# Altium PCB helix_4_single_shield_host.PcbDoc (part 2 of 2)
Units mm, origin at the board's own origin, x right, y up, seen from the top; angles counter-clockwise.
Board outline 54.61 x 130.81 mm, 2 copper layers (Top Layer, Bottom Layer); 77 components, 135 nets, 533 pads, 664 vias.
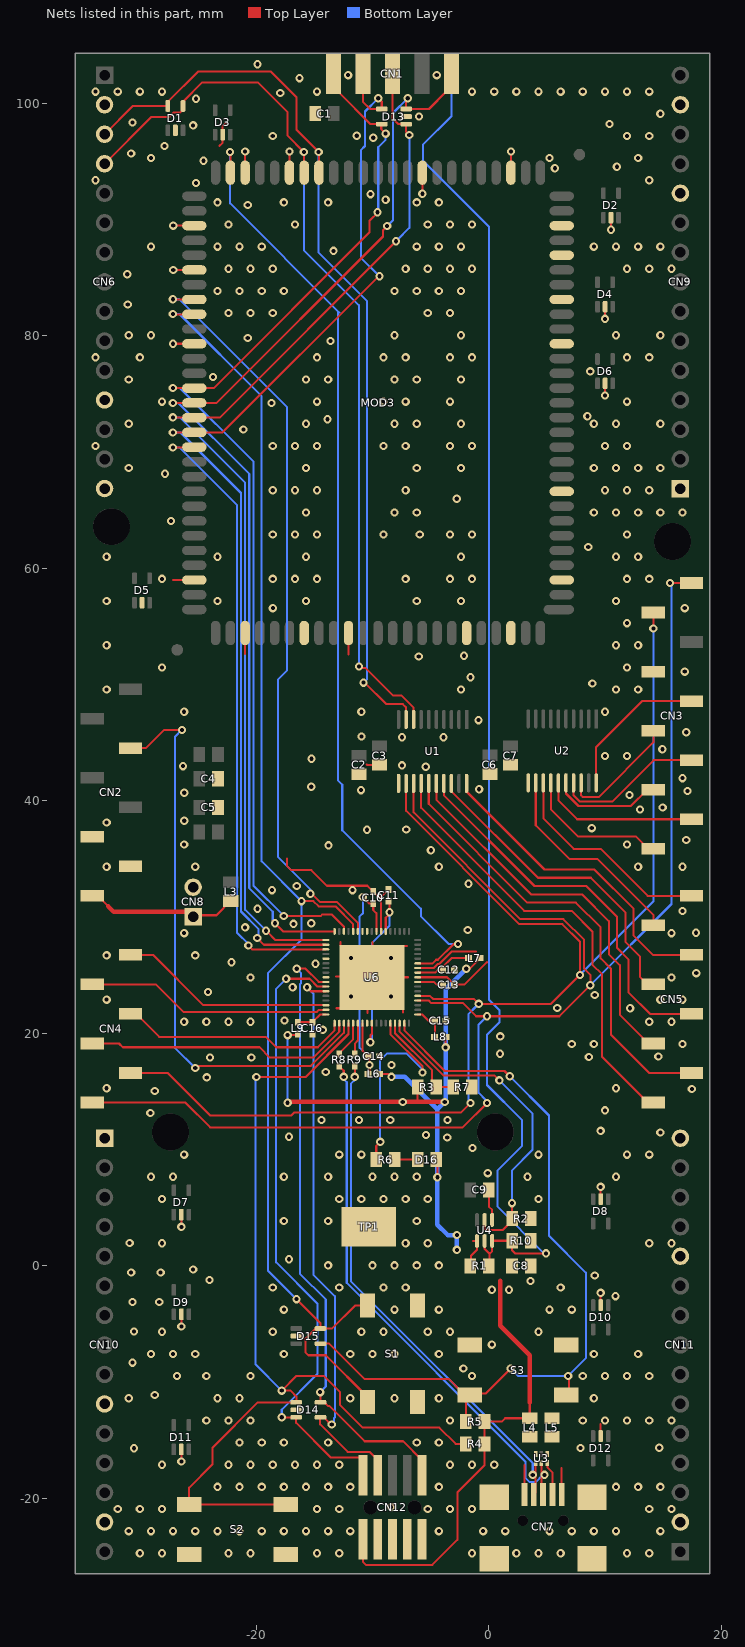
[diagram p2: the nets of this part, all layers, seen from the top]

## Via types
v1: diameter 0.711, hole 0.356, Top Layer to Bottom Layer, tented both sides, 634 vias
v2: diameter 0.711, hole 0.356, Top Layer to Bottom Layer, 30 vias

## Nets (pads, with @x,y where several pads share a name; then routed paths per layer and width w, separated by ;. In a path a pad name is that pad's centre, name@x,y a point inside that pad or via, vN(x,y) a via of type N, cw(c..) or ccw(c..) an arc to the next point about the centre after c; other vN are vias at no path point) (continued)
GND: C1.1 C2.1 C3.1 C4.2 C5.2 C6.1 C7.1 C8.2 C9.2 C10.2 C11.1 C12.2 C13.2 C14.2 C15.1 C16.1 CN1.2 CN2.6 CN2.7 CN3.35 CN6.2 CN6.12 CN6.15 CN7.0@0.461,-19.911 CN7.0@0.461,-25.211 CN7.0@8.861,-19.911 CN7.0@8.861,-25.211 CN8.2 CN9.1 CN9.11 CN9.14 CN10.1 CN10.10 CN10.14 CN11.2 CN11.11 CN11.15 CN12.3 CN12.5 CN12.7 CN12.9 D1.2 D2.2 D3.2 D4.2 D5.2 D6.2 D7.2 D8.2 D9.2 D10.2 D11.2 D12.2 D13.2 D14.2 D15.2 L5.2 MOD3.3 MOD3.9 MOD3.19 MOD3.22 MOD3.25 MOD3.27 MOD3.32 MOD3.38 MOD3.47 MOD3.50 MOD3.55 MOD3.58 MOD3.63 MOD3.79 MOD3.84 MOD3.88 MOD3.91 MOD3.99 MOD3.102 R2.1 R7.2 R10.1 S1.1 S2.1 S3.1 TP1.1 U1.11 U2.11 U4.S1 U6.5 U6.9 U6.25 U6.43 U6.45 U6.58 U6.69 | length 73.2
  Top Layer w0.178: -27.185,58.994 MOD3.79@-25.335,58.994 ; v1(-27.175,79.314) MOD3.63@-25.335,79.314 ; v1(-27.155,85.664) MOD3.58@-25.335,85.664 ; v1(-27.155,89.474) MOD3.55@-25.335,89.474 ; v1(-26.454,-16.838) D11.2@-26.454,-15.789 ; v1(-26.454,-5.218) D9.2@-26.454,-4.168 ; v1(-26.454,3.355) D7.2@-26.454,4.404 ; -23.177,96.323 -22.898,96.602 D3.2@-22.898,97.305 -22.898,98.05 -22.669,98.279 -22.619,98.279 ; -20.965,52.614 MOD3.84@-20.965,54.434 ; MOD3.50@-20.965,94.034 v1(-20.965,95.854) ; -17.374,35.039 -17.374,34.413 -16.997,34.036 -15.277,34.036 -13.937,32.696 -10.46,32.696 C10.2@-9.944,32.18 -9.502,31.738 -9.271,31.738 ; MOD3.47@-17.155,94.034 v1(-17.155,95.854) ; -13.144,24.898 U6.69@-10.147,24.898 ; -13.094,22.155 U6.69@-12.763,22.155 ; U6.69@-12.763,27.54 -12.763,27.87 ; -12.075,52.584 MOD3.91@-12.075,54.434 ; -10.503,43.123 -10.47,43.09 C3.1@-9.407,43.09 ; -10.452,21.749 U6.69@-10.452,24.441 ; U6.69@-10.071,24.822 -6.972,24.822 ; U6.69@-10.02,24.898 -10.02,27.845 ; U6.58@-9.271,28.772 -9.271,31.738 ; C11.1@-8.688,32.321 -9.271,31.738 ; v1@-8.561,17.208 v1@-8.561,17.335 ; -7.379,21.774 U6.69@-7.379,22.104 ; U6.69@-7.379,27.514 -7.048,27.514 ; U6.43@-6.121,24.822 -3.602,24.822 C13.2@-2.967,24.187 -2.103,24.187 -0.178,26.113 ; U6.45@-6.121,25.622 -4.729,25.622 -4.377,25.974 -4.246,25.974 -3.169,27.051 -1.131,27.051 ; v1(-5.725,92.214) MOD3.38@-5.725,94.034 ; C9.2@0,6.534 0,5.099 0.281,4.818 U4.S1@0.281,3.948 ; MOD3.32@1.895,94.034 v1(1.895,95.854) ; D12.2@9.614,-14.641 9.614,-13.591 ; D10.2@9.614,-3.374 v1(9.614,-2.324) ; D8.2@9.614,5.742 v1(9.614,6.792) ; v1(9.995,74.856) D6.2@9.995,75.905 ; v1(9.995,81.46) D4.2@9.995,82.509 ; v1(10.503,89.118) D2.2@10.503,90.168
  other v1: -30.02,-24.725 -28.115,-24.725 -22.4,-24.725 -20.495,-24.725 -14.78,-24.725 -12.875,-24.725 -1.445,-24.725 2.365,-24.725 4.27,-24.725 6.175,-24.725 11.89,-24.725 13.795,-24.725 -30.973,-22.82 -29.068,-22.82 -27.163,-22.82 -25.258,-22.82 -23.353,-22.82 -21.448,-22.82 -19.543,-22.82 -17.638,-22.82 -15.733,-22.82 -13.828,-22.82 -11.923,-22.82 -4.303,-22.82 -0.493,-22.82 1.412,-22.82 5.222,-22.82 7.127,-22.82 9.032,-22.82 10.937,-22.82 14.747,-22.82 -31.925,-20.915 -30.02,-20.915 -28.115,-20.915 -14.78,-20.915 -12.875,-20.915 -5.255,-20.915 -3.35,-20.915 -1.445,-20.915 13.795,-20.915 15.7,-20.915 -8.42,-20.771 -23.353,-19.01 -21.448,-19.01 -19.543,-19.01 -17.638,-19.01 -15.733,-19.01 -13.828,-19.01 -11.923,-19.01 -4.303,-19.01 10.937,-19.01 12.842,-19.01 14.747,-19.01 -28.115,-17.105 -22.4,-17.105 -20.495,-17.105 -18.59,-17.105 -16.685,-17.105 -14.78,-17.105 -12.875,-17.105 -3.35,-17.105 -1.445,-17.105 0.46,-17.105 -30.518,-15.691 -21.448,-15.2 -19.543,-15.2 -17.638,-15.2 -13.828,-15.2 -6.208,-15.2 -4.303,-15.2 -24.305,-13.295 -22.4,-13.295 -20.495,-13.295 -3.35,-13.295 8.08,-13.295 9.985,-13.295 11.89,-13.295 13.795,-13.295 15.7,-13.295 -30.973,-11.39 -23.353,-11.39 -21.448,-11.39 -11.923,-11.39 -8.113,-11.39 -4.303,-11.39 9.032,-11.39 -28.74,-11.119 -24.305,-9.485 -20.495,-9.485 -1.445,-9.485 8.08,-9.485 9.985,-9.485 11.89,-9.485 13.795,-9.485 -26.835,-9.468 -2.197,-8.833 -30.645,-8.325 -29.068,-7.58 -27.163,-7.58 -25.258,-7.58 -17.638,-7.58 -11.923,-7.58 -10.018,-7.58 -8.113,-7.58 -4.303,-7.58 9.032,-7.58 12.842,-7.58 0.254,-6.782 -28.115,-5.675 -18.59,-5.675 -10.97,-5.675 -9.065,-5.675 -5.255,-5.675 -3.35,-5.675 4.27,-5.675 -30.518,-5.658 -17.638,-3.77 -8.113,-3.77 -4.303,-3.77 5.222,-3.77 7.127,-3.77 -30.645,-3.118 -28.359,-3.118 10.884,-2.61 -18.59,-1.865 -12.875,-1.865 -9.065,-1.865 -7.16,-1.865 6.175,-1.865 -24.041,-1.213 9.106,-0.832 -30.772,-0.578 -28.232,-0.578 -25.438,-0.324 -13.828,0.04 -10.018,0.04 -8.113,0.04 -6.208,0.04 -4.303,0.04 -17.183,0.565 -28.115,1.945 -7.16,1.945 -5.255,1.945 13.795,1.945 15.7,1.945 -30.899,1.962 -17.638,3.85 -13.828,3.85 -6.208,3.85 -28.115,5.755 -12.875,5.755 -10.97,5.755 -9.065,5.755 -7.16,5.755 -5.255,5.755 4.27,5.755 -29.068,7.66 -27.163,7.66 -17.638,7.66 -13.828,7.66 -10.018,7.66 -8.113,7.66 -6.208,7.66 3.317,7.66 10.937,7.66 -26.21,9.565 -12.875,9.565 -10.97,9.565 4.27,9.565 11.89,9.565 13.795,9.565 -1.41,10.141 -3.581,11.049 -17.183,11.106 -5.41,11.252 14.747,11.47 9.614,11.614 -29.121,13.138 9.985,13.375 -28.74,15.043 17.463,15.221 -32.878,15.28 10.937,15.28 -24.27,16.211 -14.033,16.669 -8.37,17.272 -23.99,17.913 -20.434,17.913 8.598,17.964 0.953,18.243 7.127,19.09 9.032,19.09 16.652,19.09 0.978,19.742 -26.21,20.995 -24.305,20.995 -22.4,20.995 -20.495,20.995 13.795,20.995 15.7,20.995 -17.589,21.114 12.154,22.155 5.88,22.18 -32.878,22.9 14.747,22.9 16.652,22.9 -11.849,23.171 -8.42,23.171 9.106,23.298 -24.168,23.552 -16.878,23.958 -20.495,24.805 15.7,24.805 17.844,25.178 -11.849,26.473 -8.42,26.473 -32.878,26.71 -25.258,26.71 -26.21,28.615 15.7,28.615 17.818,28.657 -1.816,28.886 -20.968,29.115 -16.802,29.419 -15.278,29.47 16.652,30.52 -19.901,30.715 -18.656,32.315 -11.722,32.315 -16.523,32.671 -32.878,34.33 -25.258,34.33 -4.303,34.33 12.842,34.33 16.652,34.33 -4.991,35.744 -26.21,36.235 11.89,36.235 16.98,36.633 8.852,37.649 -32.878,38.14 -26.2,38.284 12.992,39.249 14.948,39.427 12.103,40.494 -26.2,40.697 17.082,40.849 -10.998,40.919 -15.278,41.205 16.652,41.95 -26.302,42.983 9.985,43.855 11.89,43.855 14.923,44.431 -3.899,45.472 16.98,45.904 -26.21,47.665 -10.97,47.665 9.985,47.665 -32.878,49.57 -2.398,49.57 10.937,49.57 12.842,49.57 8.903,50.095 -1.587,50.628 16.853,51.111 -28.115,51.475 11.89,51.475 -6.032,52.406 -32.878,53.38 10.937,53.38 12.842,53.38 11.89,55.285 -18.58,56.572 16.853,56.572 -32.878,57.19 -23.353,57.19 -15.733,57.19 -6.208,57.19 -2.398,57.19 10.937,57.19 -28.115,59.095 -18.59,59.095 -16.685,59.095 -14.78,59.095 -7.16,59.095 -3.35,59.095 -1.445,59.095 11.89,59.095 13.795,59.095 -32.878,61 -23.353,61 -15.733,61 -2.398,61 10.937,61 12.842,61 8.547,61.83 -18.59,62.905 -16.685,62.905 -14.78,62.905 -9.065,62.905 -3.35,62.905 -1.445,62.905 11.89,62.905 -27.343,64.065 -15.733,64.81 -8.113,64.81 -6.208,64.81 9.032,64.81 10.937,64.81 12.842,64.81 14.747,64.81 16.652,64.81 -18.59,66.715 -16.685,66.715 -14.78,66.715 -7.16,66.715 9.985,66.715 11.89,66.715 13.795,66.715 -27.851,68.129 -30.973,68.62 -15.733,68.62 -6.208,68.62 -2.398,68.62 9.032,68.62 10.937,68.62 12.842,68.62 14.747,68.62 -33.83,70.525 -18.59,70.525 -16.685,70.525 -14.78,70.525 -9.065,70.525 -7.16,70.525 -3.35,70.525 -1.445,70.525 9.985,70.525 11.89,70.525 -21.12,71.939 -30.973,72.43 -15.733,72.43 -8.113,72.43 -6.208,72.43 -2.398,72.43 9.032,72.43 10.937,72.43 14.747,72.43 -13.881,72.828 8.471,73.082 -18.707,74.225 -28.115,74.335 -14.78,74.335 -9.065,74.335 -7.16,74.335 -3.35,74.335 11.89,74.335 -30.973,76.24 -15.733,76.24 -13.828,76.24 -8.113,76.24 -6.208,76.24 -2.398,76.24 -23.736,76.46 8.725,76.943 -33.83,78.145 -30.02,78.145 -14.78,78.145 -9.065,78.145 -7.16,78.145 -3.35,78.145 -1.445,78.145 11.89,78.145 13.795,78.145 -13.627,79.559 -20.739,79.813 -30.973,80.05 -29.068,80.05 -8.113,80.05 -2.398,80.05 10.937,80.05 14.747,80.05 -22.4,81.955 -20.495,81.955 -18.59,81.955 -5.255,81.955 -3.35,81.955 -23.353,83.86 -21.448,83.86 -19.543,83.86 -17.638,83.86 -8.113,83.86 -6.208,83.86 -4.303,83.86 -2.398,83.86 -31.102,85.299 -22.4,85.765 -20.495,85.765 -18.59,85.765 -7.16,85.765 -5.255,85.765 -3.35,85.765 -1.445,85.765 11.89,85.765 13.795,85.765 15.7,85.765 -13.373,87.306 -29.068,87.67 -23.353,87.67 -21.448,87.67 -19.543,87.67 -6.208,87.67 -4.303,87.67 -2.398,87.67 9.032,87.67 10.937,87.67 12.842,87.67 14.747,87.67 -22.4,89.575 -16.685,89.575 -5.255,89.575 -3.35,89.575 -1.445,89.575 -20.739,91.243 -23.353,91.48 -17.638,91.48 -13.828,91.48 -6.208,91.48 -4.303,91.48 -8.877,91.7 -10.173,92.183 -25.184,93.148 -33.83,93.385 13.795,93.385 5.677,94.418 11.011,94.545 -24.549,95.053 -29.068,95.29 5.222,95.29 12.842,95.29 -30.772,95.688 -27.902,96.323 -9.944,97.034 -18.59,97.195 11.89,97.195 13.795,97.195 -11.366,97.212 -25.438,98.101 10.376,98.228 -30.645,98.355 -6.007,98.863 14.747,99.1 -25.184,100.387 -17.945,100.895 -33.83,101.005 -31.925,101.005 -30.02,101.005 -28.115,101.005 -14.78,101.005 -1.445,101.005 0.46,101.005 2.365,101.005 4.27,101.005 6.175,101.005 8.08,101.005 9.985,101.005 11.89,101.005 13.795,101.005 -16.294,102.165 -12.103,102.419 -4.483,102.419 -19.901,103.359
  other v2: 7.874,-15.672 14.656,-15.646 0.254,-2.057 1.727,-2.057 3.581,-1.295 -0.102,7.976 -14.402,12.548 -11.176,12.548 -8.484,12.548 -3.556,12.548 14.58,18.009 -14.287,20.301 -14.922,25.99 -22.149,26.111 -1.753,32.868 -13.792,36.17 -10.49,37.516 -7.112,37.541 -0.838,40.996 -5.436,42.926 -7.468,43.053 -15.253,43.618 -7.468,45.466 -10.947,45.542 -0.889,46.939 -2.134,52.476 -5.944,62.916 -2.769,65.989 -31.064,82.702
HALF_VIN: R3.2 R7.1 U6.31 | length 8.1
  Top Layer w0.178: U6.31@-8.071,20.872 -8.071,20.021 -4.903,16.853 R3.2@-4.903,15.494 ; R3.2@-4.522,15.367 R7.1@-3.074,15.367
LED_0: R6.2 U6.30 | length 19
  Top Layer w0.178: R6.2@-9.69,9.144 -9.69,10.326 v1(-9.348,10.668) ; U6.30@-8.471,20.872 -8.471,19.913 -5.703,17.145 v1(-5.703,16.637)
  Bottom Layer w0.178: v1@-9.348,10.414 v1(-9.348,10.668) -9.348,17.677 -8.775,18.25 -7.071,18.25 -5.703,16.882 v1(-5.703,16.637)
MOD0_A0: CN4.9 U6.15 | length 18.6
  Top Layer w0.178: CN4.9@-30.831,26.749 -28.896,26.749 -24.569,22.422 U6.15@-14.021,22.422
MOD0_A1: CN4.10 U6.16 | length 21.1
  Top Layer w0.178: CN4.10@-34.111,24.209 -28.642,24.209 -26.277,21.844 -14.797,21.844 -14.652,21.989 -14.054,21.989 U6.16@-14.021,22.022
MOD0_A2: CN4.11 U6.18 | length 20
  Top Layer w0.178: CN4.11@-30.831,21.669 -30.33,21.669 -28.353,19.691 -19.19,19.691 -18.301,18.802 -14.719,18.802 -13.271,20.25 U6.18@-13.271,20.872
MOD0_A3: CN4.12 U6.19 | length 23.4
  Top Layer w0.178: CN4.12@-34.111,19.129 -31.817,19.129 -31.49,18.802 -19.723,18.802 -18.834,17.913 -15.105,17.913 -12.871,20.148 U6.19@-12.871,20.872
MOD0_D0: CN5.21 U1.14 | length 38.4
  Top Layer w0.178: U1.14@-5.821,41.502 -5.821,39.393 3.035,30.537 7.125,30.537 8.903,28.759 8.903,25.914 9.741,25.076 9.741,17.964 13.656,14.049 CN5.21@14.149,14.049
MOD0_D1: CN5.22 U1.15 | length 38.9
  Top Layer w0.178: U1.15@-5.171,41.502 -5.171,39.734 3.315,31.248 7.48,31.248 9.614,29.115 9.614,26.448 10.503,25.559 10.503,19.869 13.783,16.589 CN5.22@17.429,16.589
MOD0_D2: CN5.23 U1.16 | length 32.8
  Top Layer w0.178: U1.16@-4.496,41.477 U1.16@-4.521,41.502 -4.521,40.1 3.62,31.959 8.014,31.959 10.325,29.648 10.325,26.803 11.265,25.863 11.265,21.596 13.373,19.488 13.551,19.488 CN5.23@13.995,19.043
MOD0_D3: CN5.24 U1.17 | length 33.4
  Top Layer w0.178: U1.17@-3.871,41.502 -3.871,40.466 3.924,32.671 8.369,32.671 11.036,30.004 11.036,27.337 12.027,26.346 12.027,23.501 13.859,21.669 CN5.24@17.429,21.669
MOD0_D4: CN5.25 U1.18 | length 27.4
  Top Layer w0.178: U1.18@-3.221,41.502 -3.221,40.832 4.229,33.382 8.774,33.382 11.748,30.408 11.748,27.87 12.992,26.625 12.992,24.866 13.649,24.209 CN5.25@14.149,24.209
MOD0_D5: CN5.26 U1.20 | length 27.2
  Top Layer w0.178: U1.20@-1.921,41.502 -1.921,40.802 4.788,34.093 9.081,34.093 12.459,30.715 12.459,28.403 14.113,26.749 CN5.26@17.429,26.749
MOD0_D6: CN5.27 U2.12 | length 17.9
  Top Layer w0.178: U2.12@4.033,41.547 4.033,37.896 6.947,34.982 9.36,34.982 14.149,30.193 CN5.27@14.149,29.289
MOD0_D7: CN5.28 U2.13 | length 18.6
  Top Layer w0.178: U2.13@4.683,41.547 4.683,38.491 7.303,35.871 9.614,35.871 13.656,31.829 CN5.28@17.429,31.829
MOD0_D8: CN3.29 U2.14 | length 12.5
  Top Layer w0.178: U2.14@5.333,41.547 5.333,39.263 7.658,36.938 12.637,36.938 13.697,35.877 CN3.29@14.149,35.877
MOD0_D9: CN3.30 U2.15 | length 13.6
  Top Layer w0.178: U2.15@5.983,41.547 5.983,40.035 7.601,38.417 CN3.30@17.429,38.417
MOD0_D10: CN3.31 U2.16 | length 9.5
  Top Layer w0.178: U2.16@6.633,41.547 6.633,40.63 7.709,39.554 12.217,39.554 13.62,40.957 CN3.31@14.149,40.957
MOD0_D11: CN3.32 U2.17 | length 12.9
  Top Layer w0.178: U2.17@7.283,41.547 7.283,40.488 7.836,39.935 9.995,39.935 10.61,39.935 14.172,43.497 CN3.32@17.429,43.497
MOD0_D12: CN3.33 U2.18 | length 10.3
  Top Layer w0.178: U2.18@7.933,41.547 7.933,40.473 8.09,40.316 9.436,40.316 14.149,45.029 CN3.33@14.149,46.037
MOD0_D13: CN3.34 U2.20 | length 12.9
  Top Layer w0.178: U2.20@9.233,41.547 9.233,42.729 9.233,44.634 13.17,48.571 17.423,48.571 CN3.34@17.429,48.577
NCE: MOD3.70 U6.3 | length 54.8
  Top Layer w0.178: v1@-27.343,70.384 v1(-27.185,70.384) -25.375,70.384 MOD3.70@-25.335,70.424 ; v1@-20.626,27.622 -20.626,27.495 -20.352,27.222 U6.3@-14.021,27.222
  Bottom Layer w0.178: v1@-27.185,70.261 v1(-27.185,70.384) -26.601,70.384 -21.679,65.462 -21.679,28.676 v1@-20.626,27.622
  other v1: -20.689,27.559
NCONFIG: D15.5 MOD3.61 S1.2 U6.64 | length 117.9
  Top Layer w0.178: v1@-27.131,81.845 MOD3.61@-25.311,81.845 ; v1(-16.548,-2.864) -14.482,-4.93 D15.5@-14.482,-5.389 -14.882,-5.389 -15.786,-6.293 -15.786,-7.436 -15.532,-7.69 -14.033,-7.69 -10.443,-11.28 S1.2@-10.443,-11.713 ; v1@-15.99,31.369 -15.096,31.369 -14.644,30.917 -14.637,30.924 -13.196,30.924 -11.671,29.399 U6.64@-11.671,28.772 ; D15.5@-14.516,-5.404 -13.5,-5.404 -11.509,-3.413 S1.2@-10.443,-3.413
  Bottom Layer w0.178: v1(-27.185,81.875) -26.611,81.875 -19.545,74.809 -19.545,34.797 v1(-16.117,31.369) -16.117,28.047 -19.012,25.152 -19.012,-0.4 v1(-16.548,-2.864)
NCSO: MOD3.51 U6.46 | length 82.8
  Top Layer w0.178: v1(-22.263,95.815) -22.235,95.787 MOD3.51@-22.235,94.034 ; U6.46@-6.121,26.022 -4.832,26.022 -4.525,26.329 -4.393,26.329 -3.036,27.686 -2.782,27.686 v1@-2.655,27.559
  Bottom Layer w0.178: v1(-22.263,95.815) -22.263,91.395 -12.865,81.997 ; -12.992,81.997 -12.992,41.764 -12.611,41.383 -12.611,37.471 -5.855,30.715 -5.855,30.08 -3.461,27.686 v1(-2.655,27.686)
NetC12_1: C12.1 L7.1 U6.44 | length 4.7
  Top Layer w0.178: U6.44@-6.121,25.222 -4.626,25.222 -4.391,25.457 C12.1@-3.967,25.457 ; -3.975,25.711 -3.213,26.473 L7.1@-1.816,26.473
NetC13_1: C13.1 U6.42 | length 2.3
  Top Layer w0.178: U6.42@-6.121,24.422 -4.73,24.422 -4.495,24.187 C13.1@-3.967,24.187
NetC15_2: C15.2 L8.1 U6.35 | length 2.9
  Top Layer w0.178: U6.35@-6.121,21.622 -5.735,21.622 -5.195,21.082 C15.2@-4.941,21.082 ; C15.2@-4.679,21.082 -4.653,21.056 -4.653,20.794 L8.1@-4.653,19.558
NetC16_2: C16.2 L9.1 U6.17 | length 2.7
  Top Layer w0.178: L9.1@-16.448,20.953 C16.2@-15.128,20.953 ; C16.2@-15.156,20.982 -14.516,21.622 U6.17@-14.021,21.622
NetCN7_5: CN7.5 L5.1 U3.4 | length 2.3
  Top Layer w0.178: U3.4@5.026,-16.181 U3.4@5.033,-16.181 ; CN7.5@6.261,-19.661 6.261,-17.409
NetD16_K: D16.K R6.1 | length 2
  Top Layer w0.178: R6.1@-8.09,9.144 D16.K@-6.134,9.144
NetU6_61: U6.61
NetU6_62: U6.62
NSTATUS: MOD3.60 U6.63 | length 64.7
  Top Layer w0.178: v1@-27.131,83.115 MOD3.60@-25.311,83.115 ; v1@-15.355,32.131 -14.504,31.28 -13.049,31.28 -11.271,29.502 U6.63@-11.271,28.772
  Bottom Layer w0.178: v1@-27.161,83.145 -26.636,83.145 -17.374,73.883 -17.374,51.199 -18.123,50.451 -18.123,35.153 -15.355,32.385 v1@-15.355,32.013
  other v1: -15.355,32.004 -27.185,83.145
P15_6: R8.1 U6.22 | length 3.1
  Top Layer w0.178: R8.1@-12.738,18.21 -12.738,18.416 -11.671,19.483 U6.22@-11.671,20.872
P15_7: R9.1 U6.23 | length 2.8
  Top Layer w0.178: R9.1@-11.532,18.21 -11.532,19.12 -11.271,19.38 U6.23@-11.271,20.872
POWER_EN: R2.2 U4.G1 U6.32 | length 28.5
  Top Layer w0.178: U6.32@-7.671,20.872 -7.671,20.146 -3.908,16.383 0.476,16.383 v1(0.902,15.957) ; U4.G1@-0.369,3.948 -0.369,3.225 -0.225,3.081 1.208,3.081 1.994,3.867 v1(1.994,5.391)
  Bottom Layer w0.178: v1(0.902,15.957) 3.747,13.113 3.747,9.963 1.994,8.21 v1(1.994,5.391)
POWER_EN_N: CN1.10 R1.1 R10.2 U4.D1 U4.G2 | length 118.6
  Top Layer w0.178: U4.G2@-0.369,2.148 -0.369,1.453 0.05,1.034 ; R1.1@0.05,0 0.05,1.034 ; v1(4.915,1.073) 2.248,1.073 2.006,1.315 R10.2@2.006,2.159 0.292,2.159 U4.D1@0.281,2.148 0.281,1.265 0.05,1.034
  Bottom Layer w0.178: CN1.10@-3.213,102.54 -3.213,98.883 -5.677,96.419 -5.677,95.078 0.013,89.389 0.013,22.892 0.902,22.003 0.902,20.936 -0.165,19.869 -0.165,15.551 2.858,12.528 2.858,10.319 0.724,8.185 0.724,5.11 v1@4.778,1.056
PSOC_VDDD: C10.1 C14.1 L6.2 U6.24 U6.59 | length 23.3
  Top Layer w0.178: U6.24@-10.871,20.872 -10.871,18.503 -10.267,17.899 L6.2@-10.267,16.383 ; v1(-10.858,31.731) -10.308,31.18 C10.1@-9.944,31.18 -9.944,30.6 -9.671,30.327 U6.59@-9.671,28.772
  Bottom Layer w0.178: v1@-10.82,31.718 -10.82,30.353 -11.112,30.061 -11.112,18.744 -10.275,17.907 v1(-10.275,17.272)
RST_0: CN2.3 U6.20 | length 50
  Top Layer w0.178: CN2.3@-30.831,44.529 -29.5,44.529 -27.928,46.101 v1(-26.404,46.101) ; v1@-25.261,17.058 -25.117,17.202 -15.314,17.202 -12.471,20.045 U6.20@-12.471,20.872
  Bottom Layer w0.178: v1(-26.404,46.101) -27.013,45.492 -27.013,18.77 v1(-25.261,17.018)
SCL: CN6.4 D1.4 MOD3.46 U1.8 | length 79.3
  Top Layer w0.178: CN6.4@-33.058,94.799 -29.019,98.838 -27.49,98.838 -27.109,99.219 -26.545,99.219 -26.312,99.451 D1.4@-26.312,99.769 -26.312,100.148 -24.657,101.803 -19.869,101.803 -17.31,99.244 -17.31,97.212 v1(-15.913,95.815) ; MOD3.46@-15.885,94.034 v1@-15.885,95.974 ; v1@-11.037,51.435 -10.617,51.435 -8.255,49.073 -7.532,49.073 -6.471,48.012 U1.8@-6.471,47.002
  Bottom Layer w0.178: v1(-15.913,95.815) -15.913,87.357 -11.189,82.632 v1@-11.189,51.562
  other v1: -11.164,51.562
SCL_0: CN3.38 CN4.14 U1.13 U6.38 | length 125.6
  Top Layer w0.178: CN4.14@-34.111,14.049 -26.102,14.049 -23.966,11.913 -2.254,11.913 v1(-0.165,14.002) ; U1.13@-6.471,41.502 -6.471,39.002 2.705,29.826 6.414,29.826 8.192,28.048 8.192,25.559 8.725,25.025 v1(8.725,24.136) 6.058,21.469 v1(-0.165,21.469) -1.085,21.469 -2.219,22.603 -4.954,22.603 -5.172,22.822 U6.38@-6.121,22.822 ; v1@15.398,58.737 CN3.38@17.429,58.737
  Bottom Layer w0.178: v1@-0.254,14.09 -0.254,14.268 -0.876,14.891 -0.876,20.758 v1(-0.165,21.469) ; v1(8.725,24.136) 15.71,31.121 15.71,58.425 v1@15.398,58.737
  other v1: 15.583,58.731
SDA: CN6.3 D1.5 MOD3.45 U1.9 | length 80.2
  Top Layer w0.178: CN6.3@-33.058,97.339 -30.628,99.769 D1.5@-27.612,99.769 -27.612,100.118 -24.994,102.736 -18.778,102.736 -16.548,100.507 -16.548,97.72 v1(-14.643,95.815) ; MOD3.45@-14.615,94.034 v1@-14.615,95.974 ; v1@-10.661,50.165 -8.807,48.311 -7.405,48.311 -7.121,48.027 U1.9@-7.121,47.002
  Bottom Layer w0.178: v1(-14.643,95.815) -14.643,87.154 -10.477,82.988 -10.477,50.471 v1(-10.783,50.165)
SDA_0: CN3.37 CN4.13 U1.12 U6.39 | length 113.7
  Top Layer w0.178: CN4.13@-30.831,16.589 -27.626,16.589 -23.972,12.935 -17.012,12.935 -16.764,13.183 -2.406,13.183 v1(-1.587,14.002) ; U1.12@-7.121,41.502 -7.121,39.144 2.629,29.394 6.312,29.394 7.836,27.87 v1(7.836,25.025) 5.347,22.536 v1(-0.876,22.536) -1.299,22.959 -4.807,22.959 -5.069,23.222 U6.39@-6.121,23.222 ; v1(14.149,54.82) CN3.37@14.149,56.197
  Bottom Layer w0.178: v1(-1.587,14.002) -1.766,14.18 -1.766,21.646 v1@-1.105,22.307 ; v1(7.836,25.025) 14.149,31.338 v1(14.149,54.82)
SW_0: D14.1 R4.2 S2.2 U6.21 | length 82.8
  Top Layer w0.178: v1(-20.002,16.237) -15.776,16.237 -12.071,19.942 U6.21@-12.071,20.872 ; S2.2@-17.478,-20.526 S2.2@-25.778,-20.526 -25.778,-19.079 -23.778,-17.079 -23.778,-15.643 -19.874,-11.739 D14.1@-16.582,-11.739 ; D14.1@-16.548,-11.754 -16.548,-11.246 -17.056,-10.738 v1(-17.818,-10.738) -16.548,-9.468 -14.211,-9.468 -12.789,-10.89 -12.789,-11.976 -10.852,-13.913 -4.254,-13.913 -2.857,-15.31 R4.2@-1.981,-15.31
  Bottom Layer w0.178: v1@-20.079,16.237 -20.079,-8.477 v1(-17.818,-10.738) v1@-17.628,-10.929
SW_1: D15.4 R5.2 S3.2 U6.33 | length 68.2
  Top Layer w0.178: D15.4@-14.482,-6.689 -13.739,-6.689 -10.706,-9.722 -3.467,-9.722 -2.333,-10.856 S3.2@-2.079,-10.856 ; U6.33@-7.271,20.872 -7.271,20.249 -3.786,16.764 1.34,16.764 v1(1.791,16.313) ; R5.2@-1.981,-13.405 -1.981,-11.443 -1.53,-10.992 -0.292,-10.992 v1(1.867,-8.833) ; S3.2@-1.648,-10.856 S3.2@-1.394,-10.856 ; S3.2@6.906,-10.856 v1@6.906,-9.554
  Bottom Layer w0.178: v1(1.791,16.313) 5.169,12.935 5.169,2.597 8.344,-0.578 8.344,-7.944 v1(6.82,-9.468) 2.502,-9.468 v1(1.867,-8.833)
SWDCK: CN12.4 D14.4 U6.12 | length 50.7
  Top Layer w0.178: v1(-15.634,23.958) -15.297,23.622 U6.12@-14.021,23.622 ; D14.4@-14.516,-13.024 -14.516,-13.627 -12.141,-16.002 -10.268,-16.002 -9.563,-16.707 CN12.4@-9.563,-18.656 ; D14.4@-14.482,-13.039 -14.19,-13.039 -13.494,-13.735 v1@-13.322,-13.735
  Bottom Layer w0.178: v1@-15.622,23.946 -15.1,23.425 -15.1,-0.756 -13.246,-2.61 -13.246,-13.024 -13.322,-13.1 v1@-13.322,-13.735
  other v1: -13.513,-13.64
SWDIO: CN12.2 D14.3 U6.11 | length 55.3
  Top Layer w0.178: v1@-17.803,-13.039 D14.3@-16.582,-13.039 -16.582,-13.498 -13.595,-16.485 -13.134,-16.485 -13.133,-16.483 -10.93,-16.483 -10.833,-16.58 CN12.2@-10.833,-18.656 ; v1@-17.387,24.765 -17.317,24.695 -15.412,24.695 -14.739,24.022 U6.11@-14.021,24.022
  Bottom Layer w0.178: v1(-17.818,-13.024) -17.818,-12.364 -14.745,-9.29 -14.745,-3.245 -18.301,0.311 -18.301,23.831 v1(-17.437,24.695)
TCK: CN1.1 D13.5 MOD3.66 U6.66 | length 93.7
  Top Layer w0.178: v1(-27.185,75.504) MOD3.66@-25.335,75.504 -23.671,75.504 -10.271,88.904 -10.271,89.894 v1@-9.532,90.633 ; v1(-17.641,30.099) -14.457,30.099 -14.343,30.213 -13.491,30.213 -12.471,29.193 U6.66@-12.471,28.772 ; CN1.1@-13.373,100.895 -12.865,100.895 -10.183,98.213 D13.5@-9.216,98.213 ; D13.5@-9.259,98.17 -9.259,97.772 v1(-8.877,97.39)
  Bottom Layer w0.178: v1@-27.343,75.504 v1(-27.185,75.504) -26.565,75.504 -20.256,69.196 -20.256,32.714 v1(-17.641,30.099) ; v1@-9.513,90.633 -9.513,96.221 -8.877,96.856 v1(-8.877,97.39)
  other v1: -9.588,90.633
TDI_FPGA: CN1.9 D13.3 MOD3.67 U6.68 | length 96.7
  Top Layer w0.178: v1@-27.343,74.225 v1(-27.185,74.225) -25.344,74.225 MOD3.67@-25.335,74.234 -23.417,74.234 -9.108,88.543 -9.108,89.087 v1(-8.751,89.444) ; v1@-18.594,29.654 -17.711,28.772 U6.68@-13.271,28.772 ; v1(-6.973,100.438) -7.116,100.295 D13.3@-7.116,99.513 -5.154,99.513 -3.645,101.022 CN1.9@-3.213,101.022
  Bottom Layer w0.178: v1@-27.343,74.225 v1(-27.185,74.225) -26.708,74.225 -20.612,68.129 -20.612,32.493 -18.594,30.474 v1@-18.594,29.654 ; v1(-8.751,89.444) -8.243,89.952 -8.243,99.168 v1(-6.973,100.438)
  other v1: -18.403,29.464
TDO_FPGA: CN1.3 D13.4 MOD3.69 U6.2 | length 99
  Top Layer w0.178: v1@-27.343,71.685 v1(-27.185,71.685) -25.344,71.685 MOD3.69@-25.335,71.694 -22.909,71.694 v1@-9.446,85.157 ; v1@-19.864,28.384 -19.864,28.13 -19.355,27.622 U6.2@-14.021,27.622 ; CN1.3@-10.833,102.831 CN1.3@-10.833,102.54 -10.833,100.133 -10.213,99.513 D13.4@-9.216,99.513 -9.216,100.141 v1(-9.513,100.438)
  Bottom Layer w0.178: v1@-27.343,71.685 v1(-27.185,71.685) -26.53,71.685 -21.323,66.478 -21.323,30.484 -19.8,28.961 v1@-19.8,28.321 ; v1(-9.513,100.438) -10.655,99.296 -10.655,96.323 -11.011,95.967 -11.011,86.722 v1(-9.411,85.122)
  other v1: -19.927,28.194
TMS: CN1.5 D13.1 MOD3.68 U6.1 | length 94.7
  Top Layer w0.178: v1(-27.185,72.984) -25.355,72.984 MOD3.68@-25.335,72.964 -23.163,72.964 -8.033,88.094 v1@-8.033,88.221 ; v1@-19.102,28.765 -18.358,28.022 U6.1@-14.021,28.022 ; CN1.5@-8.293,102.831 CN1.5@-8.293,102.54 -8.293,98.736 -7.77,98.213 D13.1@-7.116,98.213 -7.116,97.552 v1(-6.846,97.282)
  Bottom Layer w0.178: v1(-27.185,72.984) -26.585,72.984 -20.968,67.367 -20.968,30.632 v1@-19.292,28.956 ; v1@-7.989,88.265 -7.862,88.265 -6.846,89.281 v1(-6.846,97.282)
  other v1: -19.165,28.829 -7.989,88.138
USB_ID: CN7.4 U3.3 | length 2.9
  Top Layer w0.178: U3.3@5.026,-16.961 5.026,-17.335 5.461,-17.77 CN7.4@5.461,-19.661
USB_M: CN7.2 R9.2 U3.1 | length 44.8
  Top Layer w0.178: v1@-11.595,16.059 -11.532,16.122 R9.2@-11.532,17.019 ; v1@3.772,-18.104 v1(3.772,-17.977) v1@4.026,-17.977 ; CN7.2@3.861,-19.661 4.026,-19.496 U3.1@4.026,-16.961
  Bottom Layer w0.178: v1@-11.468,16.059 -11.872,15.655 -11.872,-1.317 3.772,-16.961 v1@3.772,-17.952
  other v1: -11.532,16.256
USB_P: CN7.3 R8.2 U3.2 | length 47.6
  Top Layer w0.178: R8.2@-12.738,17.21 -12.738,17.05 -12.484,16.796 v1@-12.484,16.059 ; v1@4.526,-17.745 4.526,-18.253 ; U3.2@4.526,-16.961 4.526,-17.729 4.788,-17.991 4.526,-18.253 ; CN7.3@4.661,-19.661 4.526,-19.526 4.526,-18.253
  Bottom Layer w0.178: v1@-12.484,16.059 -12.227,15.802 -12.227,-1.464 3.137,-16.829 3.137,-18.222 3.514,-18.599 4.03,-18.599 4.652,-17.977 v1(4.788,-17.977)
  other v1: -12.484,16.256
VCCD: C11.2 U6.26 U6.57 | length 16.9
  Top Layer w0.178: v1(-10.198,19.234) -10.198,19.812 -10.071,19.939 U6.26@-10.071,20.872 ; U6.57@-8.871,28.772 -8.871,29.959 v1@-8.547,30.283 ; C11.2@-8.674,31.561 -8.674,31.427 -8.547,31.3 v1@-8.547,30.283 ; v1@-8.547,30.537 v1@-8.547,30.283
  Bottom Layer w0.178: v1(-10.198,19.234) -10.071,19.361 -10.071,27.743 -8.547,29.267 v1@-8.547,30.537
  other v1: -8.547,30.41
VIN_0: CN2.8 CN8.1 L3.2 | length 12.8
  Top Layer w0.178: CN2.8@-33.652,31.829 -32.753,30.931 ; CN8.1@-24.867,30.664 -24.867,30.156 -23.432,30.156 L3.2@-22.2,31.388
  Top Layer w0.381: -32.753,30.931 -32.283,30.461 CN8.1@-25.07,30.461
VIN_5V: C8.1 CN12.1 D16.A L4.2 L6.1 L7.2 L8.2 L9.2 R1.2 R3.1 R4.1 R5.1 U4.S2 | length 99.2
  Top Layer w0.178: v1@-17.31,19.869 L9.2@-16.533,19.869 ; CN12.1@-10.833,-23.521 -10.833,-25.47 -10.579,-25.724 -4.864,-25.724 -2.705,-23.565 -2.705,-19.501 -0.381,-17.177 R4.1@-0.381,-15.31 R5.1@-0.381,-13.405 1.105,-13.405 1.397,-13.113 L4.2@3.518,-13.113 ; L6.1@-9.394,16.51 -8.624,16.51 ; -6.122,14.135 R3.1@-6.122,15.367 ; D16.A@-4.534,9.144 -4.433,9.043 v2(-4.433,7.62) ; v1@-3.721,18.853 L8.2@-3.721,19.813 ; v1@-1.702,25.52 -1.697,25.52 L7.2@-0.745,26.473 ; R1.2@-1.55,0 -1.55,0.851 -1.019,1.382 U4.S2@-1.019,2.148 -1.367,2.148 ; L4.2@3.518,-13.024 3.518,-11.754
  Top Layer w0.381: v1@-17.31,14.002 -17.316,14.097 v1(-7.404,14.097) v1(-3.798,14.097) ; 0.978,-1.27 0.978,-5.15 3.518,-7.69 3.518,-11.754
  Bottom Layer w0.178: v1@-17.31,14.002 v1@-17.31,19.869
  Bottom Layer w0.381: v1(-8.37,16.256) -7.245,16.256 -4.451,13.462 -4.433,13.462 ; v1@-2.756,1.454 v1(-2.756,2.648) -3.543,2.648 -4.433,3.538 v2(-4.433,7.62) -4.433,13.462 ; v1@-1.994,25.508 -3.721,23.781 v1(-3.721,18.796) -3.721,14.174 v1(-3.798,14.097) -4.433,13.462
  other v1: -2.756,1.378 -17.31,14.027 -17.31,19.844 -1.943,25.559
VIN_USB: CN7.1 L4.1 U3.6 | length 2.6
  Top Layer w0.178: CN7.1@3.061,-19.661 3.061,-17.121 ; U3.6@4.001,-16.181 U3.6@4.026,-16.181
XRES: CN12.10 D14.5 U6.10 | length 54.5
  Top Layer w0.178: v1@-16.7,25.559 -15.773,25.559 -14.636,24.422 U6.10@-14.021,24.422 ; v1(-14.516,-10.865) -14.482,-10.899 D14.5@-14.482,-11.739 -14.144,-11.739 -13.843,-12.04 -13.741,-12.04 -10.693,-15.088 -7.372,-15.088 -5.753,-16.707 CN12.10@-5.753,-18.656
  Bottom Layer w0.178: v1(-16.523,25.559) -16.167,25.203 -16.167,24.305 -16.256,24.216 -16.256,-0.667 -14.033,-2.889 -14.033,-10.382 v1(-14.516,-10.865)
pads on no net: CN1.6 CN1.7 CN1.8 CN2.1 CN3.36 CN7.0@2.911,-21.911 CN7.0@6.411,-21.911 CN12.6 CN12.8 CN12.11 CN12.12 D1.0 D2.0 D3.0 D4.0 D5.0 D5.1 D6.0 D6.4 D7.0 D7.3 D8.0 D8.4 D9.0 D10.0 D11.0 D12.0 D13.0 D14.0 D15.0 D15.1 D15.3 FD1.0 FD2.0 MOD1.0 MOD3.6 MOD3.14 MOD3.35 MOD3.75 MOD3.78 MOD3.96 U3.5 U6.6 U6.7 U6.8

## Polygon pours and split planes (outlines as drawn)
GND on Bottom Layer "TOP FILL GND" (solid, remove dead copper, pour order 11): 18.25,-25.851 18.186,-24.581 18.25,103.689 -34.836,103.689 -34.836,-25.851
VIN_5V on Top Layer "TOP FILL GND" (solid, pour order 9): 2.908,-1.524 2.908,1.073 0.164,1.073 -0.369,1.606 -0.368,1.607 -0.368,3.08 -3.467,3.08 -3.467,-1.524
5V on Top Layer "TOP FILL GND" (solid, pour order 10): -0.368,3.181 -0.368,7.652 -3.467,7.652 -3.467,4.019 -3.467,3.181
VIN_USB on Top Layer "TOP FILL GND" (solid, pour order 8): 2.375,-13.913 2.375,-20.136 3.391,-20.136 3.391,-17.469 4.28,-16.58 4.28,-13.913
NetCN7_5 on Top Layer "TOP FILL GND" (solid, pour order 7): 6.922,-13.913 6.922,-20.136 5.55,-20.136 5.55,-17.469 4.661,-16.58 4.661,-13.913
GND on Top Layer "TOP FILL GND" (solid, remove dead copper, pour order 12): 18.25,-25.851 18.186,-24.581 18.25,103.689 -34.836,103.689 -34.836,-25.851

## Other copper
Top Layer:
  text "TOP COPPER LAYER" at 30.957,54.653 h1.52
Bottom Layer:
  text "BOTTOM COPPER LAYER" at 30.83,51.725 h1.52

## Silkscreen, mask and mechanical layers (free items; w line width, h text height)
Top Overlay:
  lines w0.152: -31.026,8.947 -31.407,9.328 ; -31.026,9.709 -31.407,9.328 ; -27.343,9.328 -31.407,9.328 ; 11.519,9.709 14.694,9.709 ; 14.313,9.328 14.694,9.709 ; 14.313,10.09 14.694,9.709
  lines w0.178: -25.438,33.319 -25.438,34.462 ; -12.98,3.359 -14.123,3.359 ; -25.438,34.462 -26.581,34.462 -25.438,35.605 -24.295,34.462 -25.438,34.462 ; -14.123,3.359 -14.123,2.216 -15.266,3.359 -14.123,4.502 -14.123,3.359
  lines w0.254: -25.184,-17.088 -17.818,-17.088 -17.818,7.296 -25.184,7.296 -25.184,-17.088
  text "01" at -35.344,102.927 h1.27 r270
  text "3.3V" at 14.694,102.927 h1.27 r180
  text "FPGA" at 2.629,102.444 h2.03
  text "5V" at -31.28,101.911 h1.27
  text "60" at 18.758,101.911 h1.27 r90
  text "JTAG" at 2.604,100.59 h2.03
  text "02" at -35.344,100.387 h1.27 r270
  text "GND" at 14.694,100.387 h1.27 r180
  text "GND" at -31.28,99.371 h1.27
  text "59" at 18.758,99.371 h1.27 r90
  text "03" at -35.344,97.847 h1.27 r270
  text "AN_9" at 14.694,97.593 h1.27 r180
  text "SDA" at -31.28,96.831 h1.27
  text "58" at 18.758,96.831 h1.27 r90
  text "04" at -35.344,95.307 h1.27 r270
  text "AN_8" at 14.694,95.053 h1.27 r180
  text "SCL" at -31.28,94.291 h1.27
  text "57" at 18.758,94.291 h1.27 r90
  text "05" at -35.344,92.767 h1.27 r270
  text "GND" at 14.694,92.767 h1.27 r180
  text "B1_00" at -31.28,91.751 h1.27
  text "56" at 18.758,91.751 h1.27 r90
  text "06" at -35.344,90.227 h1.27 r270
  text "B6_53" at 14.694,90.227 h1.27 r180
  text "B1_01" at -31.28,89.211 h1.27
  text "55" at 18.758,89.211 h1.27 r90
  text "07" at -35.344,87.687 h1.27 r270
  text "B6_52" at 14.694,87.687 h1.27 r180
  text "B1_03" at -31.28,86.671 h1.27
  text "54" at 18.758,86.671 h1.27 r90
  text "08" at -35.344,85.147 h1.27 r270
  text "B5_43" at 14.694,85.147 h1.27 r180
  text "B1_04" at -31.28,84.131 h1.27
  text "53" at 18.758,84.131 h1.27 r90
  text "09" at -35.344,82.607 h1.27 r270
  text "B5_42" at 14.694,82.607 h1.27 r180
  text "B1_05" at -31.28,81.591 h1.27
  text "52" at 18.758,81.591 h1.27 r90
  text "10" at -35.344,80.067 h1.27 r270
  text "B5_41" at 14.694,80.067 h1.27 r180
  text "B1_06" at -31.28,79.051 h1.27
  text "51" at 18.758,79.051 h1.27 r90
  text "11" at -35.344,77.527 h1.27 r270
  text "B5_40" at 14.694,77.527 h1.27 r180
  text "B1_07" at -31.28,76.511 h1.27
  text "50" at 18.758,76.511 h1.27 r90
  text "12" at -35.344,74.987 h1.27 r270
  text "B6_39" at 14.694,74.987 h1.27 r180
  text "GND" at -31.28,73.971 h1.27
  text "49" at 18.758,73.971 h1.27 r90
  text "13" at -35.344,72.447 h1.27 r270
  text "B5_38" at 14.694,72.447 h1.27 r180
  text "AN_0" at -31.28,71.685 h1.27
  text "48" at 18.758,71.431 h1.27 r90
  text "14" at -35.344,69.907 h1.27 r270
  text "B5_37" at 14.694,69.907 h1.27 r180
  text "AN_1" at -31.28,69.145 h1.27
  text "47" at 18.758,68.891 h1.27 r90
  text "15" at -35.344,67.367 h1.27 r270
  text "GND" at 14.694,67.367 h1.27 r180
  text "GND" at -31.28,66.351 h1.27
  text "46" at 18.758,66.351 h1.27 r90
  text "FOR HELIX_4" at -17.945,66.097 h2.54 r45
  text "MODULE REV C" at -15.913,62.414 h2.54 r45
  text "TOP SILK" at 30.957,59.653 h1.52
  text "NO DRAM ONLY" at -13.119,59.62 h2.54 r45
  text "© 2013 thin_layer" at -24.828,49.714 h4
  text "helix_4 FPGA Breadstick" at -18.072,37.649 h2.54
  text "VIN" at -28.943,29.521 h1.27
  text "Revision C" at 6.541,19.386 h2.54 r90
  text "VIN_SHIELD" at -24.93,18.878 h1.02 r90
  text "16" at -35.344,11.487 h1.27 r270
  text "GND" at 14.694,11.487 h1.27 r180
  text "GND" at -31.28,10.471 h1.27
  text "45" at 18.758,10.471 h1.27 r90
  text "FPGA OK" at -10.922,10.414 h2.03
  text "17" at -35.344,8.947 h1.27 r270
  text "AN_7" at 14.694,8.693 h1.27 r180
  text "B2_10" at -31.28,7.931 h1.27
  text "44" at 18.758,7.931 h1.27 r90
  text "18" at -35.344,6.407 h1.27 r270
  text "AN_6" at 14.694,6.153 h1.27 r180
  text "B2_11" at -31.28,5.391 h1.27
  text "43" at 18.758,5.391 h1.27 r90
  text "19" at -35.344,3.867 h1.27 r270
  text "AN_5" at 14.694,3.867 h1.27 r180
  text "B2_12" at -31.28,2.851 h1.27
  text "42" at 18.758,2.851 h1.27 r90
  text "20" at -35.344,1.327 h1.27 r270
  text "GND" at 14.694,1.327 h1.27 r180
  text "B2_13" at -31.28,0.311 h1.27
  text "41" at 18.758,0.311 h1.27 r90
  text "21" at -35.344,-1.213 h1.27 r270
  text "B6_51" at 14.694,-1.213 h1.27 r180
  text "FPGA" at -10.833,-1.467 h2.03
  text "B2_14" at -31.28,-2.229 h1.27
  text "40" at 18.758,-2.229 h1.27 r90
  text "22" at -35.344,-3.753 h1.27 r270
  text "B6_50" at 14.694,-3.753 h1.27 r180
  text "B2_15" at -31.28,-4.769 h1.27
  text "39" at 18.758,-4.769 h1.27 r90
  text "POWER" at -3.048,-5.08 h3.81
  text "23" at -35.344,-6.293 h1.27 r270
  text "B6_49" at 14.694,-6.293 h1.27 r180
  text "B2_16" at -31.28,-7.309 h1.27
  text "38" at 18.758,-7.309 h1.27 r90
  text "24" at -35.344,-8.833 h1.27 r270
  text "B6_48" at 14.694,-8.833 h1.27 r180
  text "B2_17" at -31.28,-9.849 h1.27
  text "37" at 18.758,-9.849 h1.27 r90
  text "25" at -35.344,-11.373 h1.27 r270
  text "B8_47" at 14.694,-11.373 h1.27 r180
  text "GND" at -31.28,-12.389 h1.27
  text "36" at 18.758,-12.389 h1.27 r90
  text "RECONFIGURE" at -11.849,-13.151 h2.03 r90
  text "26" at -35.344,-13.913 h1.27 r270
  text "B6_46" at 14.694,-13.913 h1.27 r180
  text "AN_2" at -31.28,-14.929 h1.27
  text "35" at 18.758,-14.929 h1.27 r90
  text "CAUTION: AN PINS" at -22.923,-15.208 h2.54 r90
  text "PSOC SWD" at -13.627,-15.767 h2.03
  text "ARE 5V TOLERANT" at -20.739,-16.326 h2.54 r90
  text "OTHER IO 3.3V ONLY" at -18.58,-16.326 h2.54 r90
  text "27" at -35.344,-16.453 h1.27 r270
  text "B8_45" at 14.694,-16.453 h1.27 r180
  text "AN_3" at -31.28,-17.215 h1.27
  text "34" at 18.758,-17.469 h1.27 r90
  text "28" at -35.344,-18.993 h1.27 r270
  text "B6_44" at 14.694,-18.993 h1.27 r180
  text "PB0" at -23.279,-19.12 h2.03
  text "AN_4" at -31.28,-19.755 h1.27
  text "33" at 18.758,-20.009 h1.27 r90
  text "29" at -35.344,-21.533 h1.27 r270
  text "GND" at 14.694,-21.533 h1.27 r180
  text "GND" at -31.28,-22.549 h1.27
  text "32" at 18.758,-22.549 h1.27 r90
  text "30" at -35.344,-24.073 h1.27 r270
  text "5V" at 14.694,-24.073 h1.27 r180
  text "3.3V" at -31.28,-25.089 h1.27
  text "31" at 18.758,-25.089 h1.27 r90
  text "1" at -11.925,-25.394 h1.52 r90
Top Paste:
  text "TOP PASTE" at 30.784,31.073 h1.52
Top Solder:
  text "TOP SOLDER MASK" at 30.957,57.153 h1.52
  text "TOP SOLDER MASK" at 30.784,27.802 h1.52
Bottom Solder:
  text "BOTTOM SOLDER MASK" at 30.83,49.225 h1.52
Mechanical 1:
  the board outline again, w0.178
  text "BOARD OUTLINE" at 30.784,37.802 h1.52
Mechanical 2:
  text "HELIX_4 SINGLE SHIELD REV C" at 29.092,101.132 h1.52
  text "B.SINGER - PASS DRC ON 09/08/2013" at 31.592,98.632 h1.52
  text "RELEASED 09/08/2013" at 31.592,96.132 h1.52
  text "BOARD NOTES:" at 29.092,91.132 h1.52
  text "MATERIAL:" at 31.592,88.632 h1.52
  text "2 LAYERS FR4" at 34.092,86.132 h1.52
  text "2.4MM FINISHED THICKNESS" at 34.059,83.249 h1.52
  text "PAD FINISH:" at 31.719,80.149 h1.52
  text "LEAD FREE (ROHS) HAL FINISH" at 34.219,77.649 h1.52
  text "PROVIDE LOOSE, NO TABS, NO V-SCORE" at 31.552,74.253 h1.52
  text "NO IMPEDANCE CONTROL" at 31.552,71.753 h1.52
  text "TOP PASTE / SILK ONLY" at 31.552,69.253 h1.52
  text "TOP / BOT *WHITE* SOLDER MASK" at 31.552,66.753 h1.52
  text "Layer Stackup" at 28.457,62.153 h1.52
  text "NOTE: THERE IS NO BOTTOM SILK OR PASTE" at 30.83,46.725 h1.52
  text "Mechanical Layers" at 28.344,42.228 h1.52
  text "FAB NOTES" at 30.784,34.352 h1.52
Mechanical 14:
  text "Copyright (c) 2013, Thin Layer Embedded Pty Ltd" at 28.067,15.596 h1.52
  text "All rights reserved." at 28.067,13.818 h1.52
  text "Redistribution and use in source and binary forms, with or without" at 28.067,10.262 h1.52
  text "modification, are permitted provided that the following conditions are met:" at 28.067,8.484 h1.52
  text "1. Redistributions of source code must retain the above copyright notice," at 28.067,4.928 h1.52
  text "this list of conditions and the following disclaimer." at 28.067,3.15 h1.52
  text "2. Redistributions in binary form must reproduce the above copyright notice," at 28.067,1.372 h1.52
  text "this list of conditions and the following disclaimer in the documentation" at 28.067,-0.406 h1.52
  text "and/or other materials provided with the distribution." at 28.067,-2.184 h1.52
  text "THIS SOFTWARE IS PROVIDED BY THE COPYRIGHT HOLDERS AND CONTRIBUTORS \"AS IS\"" at 28.067,-5.74 h1.52
  text "AND ANY EXPRESS OR IMPLIED WARRANTIES, INCLUDING, BUT NOT LIMITED TO, THE" at 28.067,-7.518 h1.52
  text "IMPLIED WARRANTIES OF MERCHANTABILITY AND FITNESS FOR A PARTICULAR PURPOSE" at 28.067,-9.296 h1.52
  text "ARE DISCLAIMED. IN NO EVENT SHALL THE COPYRIGHT OWNER OR CONTRIBUTORS BE" at 28.067,-11.074 h1.52
  text "LIABLE FOR ANY DIRECT, INDIRECT, INCIDENTAL, SPECIAL, EXEMPLARY, OR" at 28.067,-12.852 h1.52
  text "CONSEQUENTIAL DAMAGES (INCLUDING, BUT NOT LIMITED TO, PROCUREMENT OF" at 28.067,-14.63 h1.52
  text "SUBSTITUTE GOODS OR SERVICES; LOSS OF USE, DATA, OR PROFITS; OR BUSINESS" at 28.067,-16.408 h1.52
  text "INTERRUPTION) HOWEVER CAUSED AND ON ANY THEORY OF LIABILITY, WHETHER IN" at 28.067,-18.186 h1.52
  text "CONTRACT, STRICT LIABILITY, OR TORT (INCLUDING NEGLIGENCE OR OTHERWISE)" at 28.067,-19.964 h1.52
  text "ARISING IN ANY WAY OUT OF THE USE OF THIS SOFTWARE, EVEN IF ADVISED OF THE" at 28.067,-21.742 h1.52
  text "POSSIBILITY OF SUCH DAMAGE." at 28.067,-23.52 h1.52
Mechanical 15:
  text "IGNORE THIS LAYER" at 30.449,25.1 h1.52

## Dimensions
-35.598,105.594 to -35.598,-26.486 on Mechanical 1
-35.598,105.594 to 19.012,104.324 on Mechanical 1

## Text inside footprints (layer, text, board x,y; h text height)
CN1: Top Overlay "9" at -1.848,101.974 h1; Top Overlay "1" at -15.248,101.974 h1
CN2: Top Overlay "IOREF" at -29.026,46.734 h1.27; Top Overlay "RESET" at -29.026,44.194 h1.27; Top Overlay "3V3" at -29.026,41.654 h1.27; Top Overlay "5V" at -29.026,39.114 h1.27; Top Overlay "GND" at -29.026,36.574 h1.27; Top Overlay "GND" at -29.026,34.034 h1.27; Top Overlay "VIN" at -29.026,31.494 h1.27
CN3: Top Overlay "D8" at 10.299,35.417 h1.27; Top Overlay "D9" at 10.299,37.957 h1.27; Top Overlay "D10" at 10.299,40.497 h1.27; Top Overlay "D11" at 10.299,43.037 h1.27; Top Overlay "D12" at 10.299,45.339 h1.27; Top Overlay "D13" at 10.299,47.879 h1.27; Top Overlay "GND" at 8.394,50.657 h1.27; Top Overlay "AREF" at 8.394,53.197 h1.27; Top Overlay "A5/SCL" at 8.394,58.277 h1.27; Top Overlay "A4/SDA" at 8.394,55.737 h1.27
CN4: Top Overlay "A5/SCL" at -29.026,13.714 h1.27; Top Overlay "A4/SDA" at -29.026,16.254 h1.27; Top Overlay "A3" at -29.026,18.794 h1.27; Top Overlay "A2" at -29.026,21.334 h1.27; Top Overlay "A1" at -29.026,23.874 h1.27; Top Overlay "A0" at -29.026,26.414 h1.27
CN5: Top Overlay "D7" at 10.299,31.369 h1.27; Top Overlay "D6" at 10.299,28.829 h1.27; Top Overlay "D5" at 10.299,26.289 h1.27; Top Overlay "D4" at 10.299,23.749 h1.27; Top Overlay "D3" at 10.299,21.209 h1.27; Top Overlay "D2" at 10.299,18.669 h1.27; Top Overlay "D1/TX" at 9.029,16.129 h1.27; Top Overlay "D0/RX" at 9.029,13.589 h1.27
MOD1: Top Overlay "1" at -33.106,52.403 h5.08